# Altium PCB base.PcbDoc
Units mm, origin at the board's own origin, x right, y up, seen from the top; angles counter-clockwise.
Board outline 120.51 x 80.51 mm, 2 copper layers (Top Layer, Bottom Layer); 50 components, 42 nets, 143 pads, 4 vias.
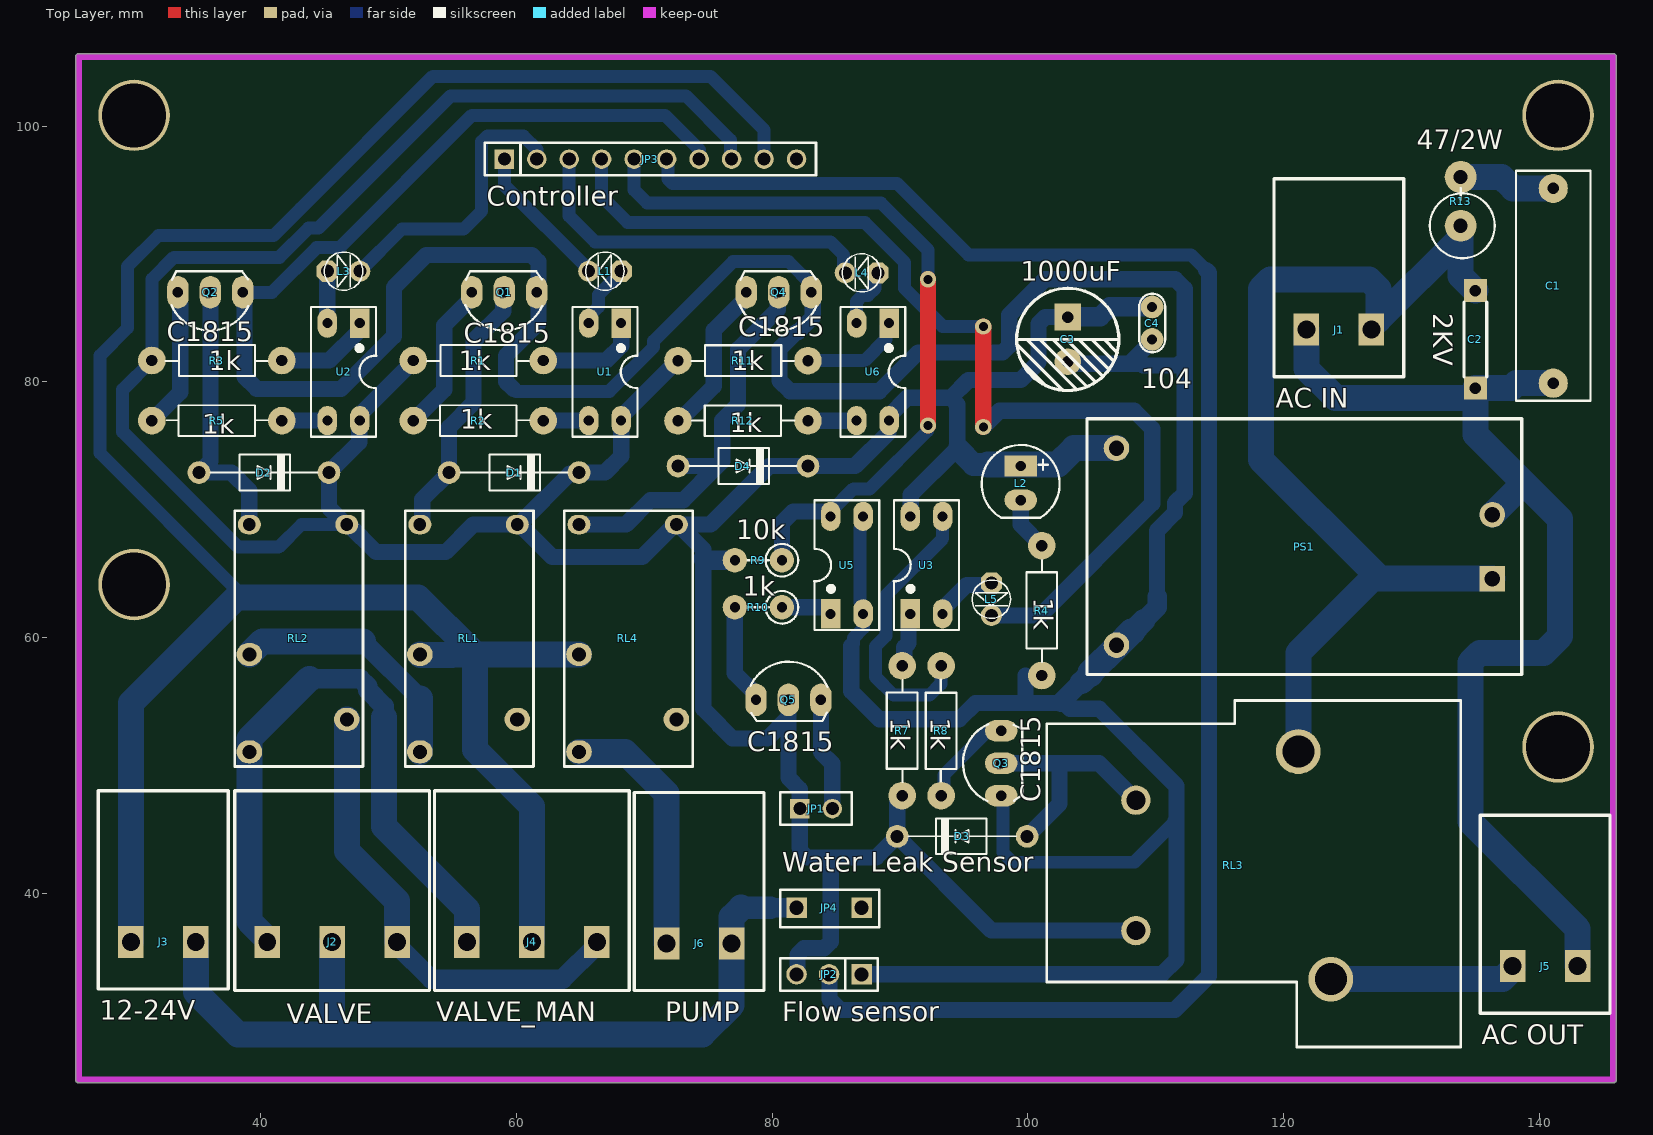
[diagram p0: Top Layer view]
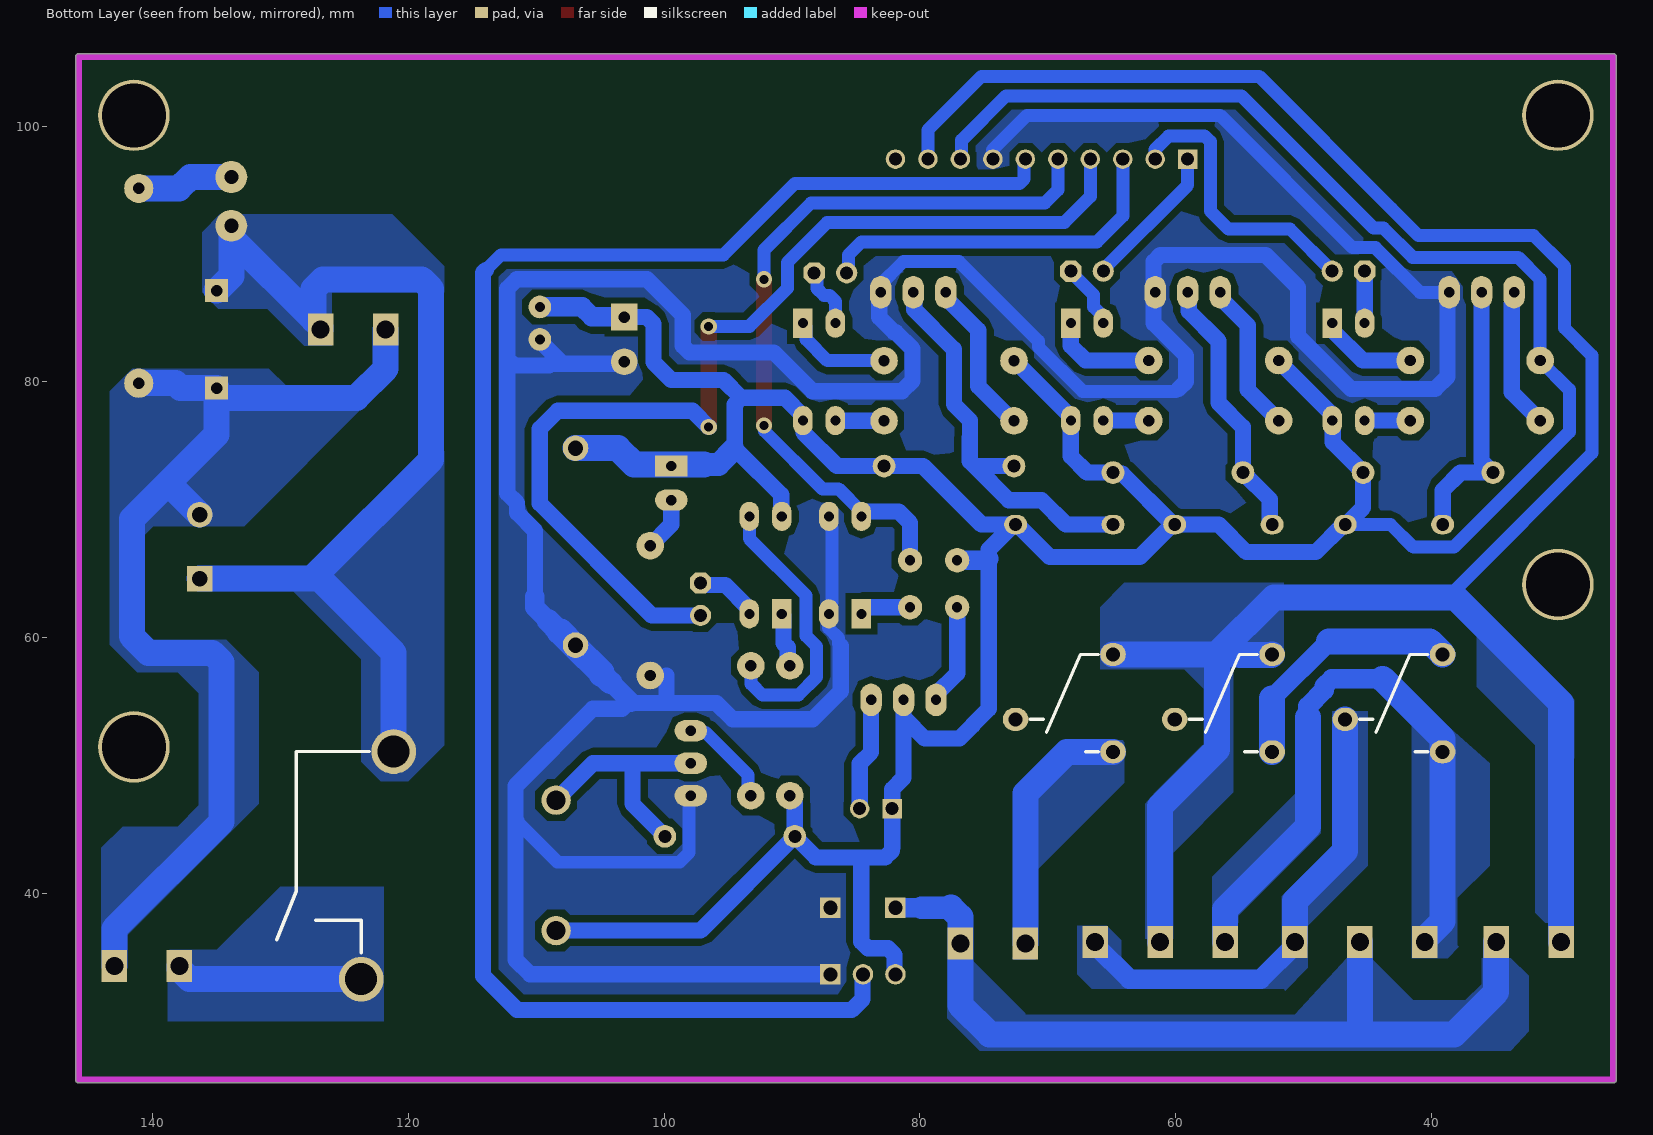
[diagram p1: Bottom Layer view, seen from below]

## Layer stack, top to bottom
Top Solder: solder mask 0.0102, Solder Resist, Dk 3.5
Top Layer: signal copper 0.0356
Dielectric 1: dielectric 0.32, FR-4, Dk 4.8
Bottom Layer: signal copper 0.0356
Bottom Solder: solder mask 0.0102, Solder Resist, Dk 3.5

## Board outline
25.527,25.41 ccw(c25.781,25.41) 25.781,25.156 145.781,25.156 ccw(c145.781,25.41) 146.035,25.41 146.035,105.41 ccw(c145.781,105.41) 145.781,105.664 25.781,105.664 ccw(c25.781,105.41) 25.527,105.41

## Design rules (kind name [scope] priority, off if disabled: settings)
Clearance Clearance_1 [OnMid vs InNet('AC_IN') And OnMid] p1: gap=1.27 ignorepadtopadclearanceinfootprint=FALSE sourcerule=48 cellrowname=All cellrowtype=0 cellcolname=AC_IN cellcoltype=1 innerlayers=TRUE
Clearance Clearance_2 [(ExistsOnLayer('Top Layer') Or ExistsOnLayer('Bottom Layer')) vs InNet('AC_IN') And (ExistsOnLayer('Top Layer') Or ExistsOnLayer('Bottom Layer'))] p2: gap=1.27 ignorepadtopadclearanceinfootprint=FALSE sourcerule=48 cellrowname=All cellrowtype=0 cellcolname=AC_IN cellcoltype=1 outerlayers=TRUE
Clearance Clearance_3 [ vs InNet('AC_IN')] p3: gap=0.254 ignorepadtopadclearanceinfootprint=FALSE sourcerule=48 cellrowname=All cellrowtype=0 cellcolname=AC_IN cellcoltype=1
Clearance Clearance_1 [OnMid vs InNet('AC_N') And OnMid] p4: gap=1.27 ignorepadtopadclearanceinfootprint=FALSE sourcerule=48 cellrowname=All cellrowtype=0 cellcolname=AC_N cellcoltype=1 innerlayers=TRUE
Clearance Clearance_2 [(ExistsOnLayer('Top Layer') Or ExistsOnLayer('Bottom Layer')) vs InNet('AC_N') And (ExistsOnLayer('Top Layer') Or ExistsOnLayer('Bottom Layer'))] p5: gap=1.27 ignorepadtopadclearanceinfootprint=FALSE sourcerule=48 cellrowname=All cellrowtype=0 cellcolname=AC_N cellcoltype=1 outerlayers=TRUE
Clearance Clearance_3 [ vs InNet('AC_N')] p6: gap=0.254 ignorepadtopadclearanceinfootprint=FALSE sourcerule=48 cellrowname=All cellrowtype=0 cellcolname=AC_N cellcoltype=1
Clearance Clearance_1 [OnMid vs InNet('AC_OUT') And OnMid] p7: gap=1.27 ignorepadtopadclearanceinfootprint=FALSE sourcerule=48 cellrowname=All cellrowtype=0 cellcolname=AC_OUT cellcoltype=1 innerlayers=TRUE
Clearance Clearance_2 [(ExistsOnLayer('Top Layer') Or ExistsOnLayer('Bottom Layer')) vs InNet('AC_OUT') And (ExistsOnLayer('Top Layer') Or ExistsOnLayer('Bottom Layer'))] p8: gap=1.27 ignorepadtopadclearanceinfootprint=FALSE sourcerule=48 cellrowname=All cellrowtype=0 cellcolname=AC_OUT cellcoltype=1 outerlayers=TRUE
Clearance Clearance_3 [ vs InNet('AC_OUT')] p9: gap=0.254 ignorepadtopadclearanceinfootprint=FALSE sourcerule=48 cellrowname=All cellrowtype=0 cellcolname=AC_OUT cellcoltype=1
Clearance Clearance_1 [OnMid vs OnMid] p10: gap=0.508 ignorepadtopadclearanceinfootprint=FALSE sourcerule=48 cellrowname=All cellrowtype=0 cellcolname=All cellcoltype=0 innerlayers=TRUE
Clearance Clearance_2 [(ExistsOnLayer('Top Layer') Or ExistsOnLayer('Bottom Layer')) vs (ExistsOnLayer('Top Layer') Or ExistsOnLayer('Bottom Layer'))] p11: gap=0.508 ignorepadtopadclearanceinfootprint=FALSE sourcerule=48 cellrowname=All cellrowtype=0 cellcolname=All cellcoltype=0 outerlayers=TRUE
Clearance [All] p12: gap=0.635 ignorepadtopadclearanceinfootprint=FALSE ismatrix=TRUE miname0=AC_OUT mitype0=1 miname1=AC_N mitype1=1 miname2=AC_IN mitype2=1
PolygonConnect [All] p1: connectstyle=Direct reliefconductorwidth=0.254 reliefentries=4 polygonreliefangle="90 Angle" airgapwidth=0.254
RoutingVias [All] p1: holewidth=0.711 width=1.27 viastyle="Through Hole" minholewidth=0.711 minwidth=1.27 maxholewidth=0.711 maxwidth=1.27
SolderMaskExpansion [All] p1: expansion=0.102 istentingtop=FALSE
SupplyNets "Schematic Supply Nets_1" [InNet('GND')] p1: voltage=0.000
SupplyNets "Schematic Supply Nets_2" [InNet('VCC')] p2: voltage=0.000
SupplyNets "Schematic Supply Nets" [InNet('+5')] p3: voltage=0.000
Width [All] p1: maxlimit=2.032 minlimit=1.016 preferedwidth=1.27 minimp=50.000000 maximp=50.000000 favimp=50.000000
30 further rules are at their usual default settings.

## Components (designator, comment, footprint, x,y, rotation, side; value= is the part's Value field where it differs from the comment)
C1 "CN" "Cap 15mm" 141.097,95.123 r270 top
C2 "2KV" "Cap 7.5mm" 135.001,79.502 r90 top
C3 "1000uF" "tu hoa 8mm" 103.124,83.312 r270 top
C4 "104" "Cap 2.54mm" 109.728,83.312 r90 top
D1 "Diode" DIO-1A 54.737,72.898 r0 top value=1N5007
D2 "Diode" DIO-1A 35.179,72.898 r0 top value=1N5007
D3 "Diode" DIO-1A 99.949,44.45 r180 top value=1N5007
D4 "Diode" DIO-1A 72.644,73.406 r0 top value=1N5007
J1 "AC IN" "CON 2 2EDG5.08" 121.793,84.074 r0 top
J2 "VALVE" "CON 3 2EDG5.08" 40.513,36.195 r0 top
J3 "12-24V" "CON 2 2EDG5.08" 29.845,36.195 r0 top
J4 "VALVE_MAN" "CON 3 2EDG5.08" 56.134,36.195 r0 top
J5 "AC OUT" "CON 2 2EDG5.08" 137.922,34.29 r0 top
J6 "PUMP" "CON 2 2EDG5.08" 71.755,36.068 r0 top
JP1 "Water Leak Sensor" "JP 1x2 CT" 82.169,46.609 r0 top
JP2 "Flow sensor" "JP 1x3 DT" 86.995,33.655 r180 top
JP3 "Controller" "JP 1x10 CT" 59.055,97.409 r0 top
JP4 "Jumper" "Jumper 5.08" 81.915,38.862 r0 top
L1 "LED 3mm" LED-3MM-RED 68.199,88.646 r180 top
L2 "LED 5mm" LED-5MM-Green 99.441,73.279 r270 top
L3 "LED 3mm" LED-3MM-RED 45.212,88.646 r0 top
L4 "LED 3mm" LED-3MM-RED 88.265,88.519 r180 top
L5 "LED 3mm" LED-3MM-RED 97.155,64.262 r270 top
PS1 "HLK-PM01 5V" CONV_HLK-PM01 136.334,67.103 r180 top
Q1 "C1815" TO92 59.055,86.995 r180 top value=C9014
Q2 "C1815" TO92 36.068,86.995 r180 top value=C9014
Q3 "C1815" TO92 97.917,50.165 r90 top value=C9014
Q4 "C1815" TO92 80.518,86.995 r180 top value=C9014
Q5 "C1815" TO92 81.28,55.118 r0 top value=C9014
R1 "1k" RES-1/4W 57.404,81.534 r0 top
R2 "1k" RES-1/4W 56.642,77.089 r180 top
R3 "1k" RES-1/4W 36.957,81.534 r0 top
R4 "1k" RES-1/4W 101.219,62.484 r90 top
R5 "1k" RES-1/4W 36.195,77.089 r180 top
R7 "1k" RES-1/4W 90.297,53.086 r90 top
R8 "1k" RES-1/4W 93.091,52.324 r270 top
R9 "10k" RES-1/4WD 79.121,66.04 r180 top
R10 "1k" RES-1/4WD 79.121,62.357 r180 top
R11 "1k" RES-1/4W 78.105,81.52 r0 top
R12 "1k" RES-1/4W 77.343,77.075 r180 top
R13 "47/2W" R2WD 133.858,97.282 r270 top value="R2W - 47"
RL1 "ALQ Relay" Relay-LQ-form-C 52.451,68.834 r270 top
RL2 "ALQ Relay" Relay-LQ-form-C 39.116,68.834 r270 top
RL3 "HF105F-1/005D-1HS" Relay-HF-30A-Form-A 108.458,47.274 r270 top
RL4 "ALQ Relay" Relay-LQ-form-C 64.897,68.834 r270 top
U1 "PC817" DIP4 68.199,84.582 r180 top
U2 "PC817" DIP4 47.752,84.582 r180 top
U3 "PC817" DIP4 90.805,61.849 r0 top
U5 "PC817" DIP4 84.582,61.849 r0 top
U6 "PC817" DIP4 89.154,84.582 r180 top

## Footprints (in the part's own frame and the unit in brackets; to place one, negate y for a bottom-side part, rotate by r counter-clockwise, add the part's x,y. Pads: shape width x height; smd on the part's side, far side on the other; paste and mask are expansions set on the pad)
"Cap 2.54mm" [mil]
  round 70 hole 31: 1(0,0) 2(100,0)
  silkscreen extent -40,-40 141,40, body extent -60,-30 170,37, height 265
"Cap 7.5mm" [mm] "103 2KV"
  rect 1.8x1.8 hole 0.9: 1(0,0) 2(7.62,0)
  silkscreen extent 0.89,-0.89 6.73,0.89, body extent -0.19,-1.2 7.81,1.19, height 9.03
"Cap 15mm" [mil]
  round 90 hole 35: 1(0,0) 2(600,0)
  silkscreen extent -54,-115 654,115, body extent -54,-145 654,150, height 731
"CON 2 2EDG5.08" [mm]
  rect 2x2.5 hole 1.4: 1(0,0) 2(5.08,0)
  silkscreen extent -2.54,-3.68 7.62,11.81, body extent -2.54,-3.74 7.62,11.87, height 21.08
"CON 3 2EDG5.08" [mm]
  rect 2x2.5 hole 1.4: 1(0,0) 2(5.08,0) 3(10.16,0)
  silkscreen extent -2.54,-3.81 12.7,11.81, body extent -2.54,-3.81 12.7,11.8, height 21.08
CONV_HLK-PM01 [mm]
  rect 2x2 hole 1.2: 1(0,2.5)
  round 2 hole 1.2: 2(0,-2.5) 3(29.4,7.7) 4(29.4,-7.7)
  silkscreen extent -2.3,-10 31.7,10, body extent -2.29,-10.1 31.71,10.1, height 15.3
DIO-1A [mil]
  round 70 hole 40: 1(0,0) 2(400,0)
  silkscreen extent 35,-55 365,55, body extent -11,-50 411,54, height 102
DIP4 [mil]
  rect 60x90 hole 31: 1(0,0)
  oval 60x90 hole 31: 2(100,0) 3(100,300) 4(0,300)
  silkscreen extent -50,-50 150,350, body extent -59,-10 159,305, height 170
"JP 1x2 CT" [mm] "JP 1x2 CT"
  rect 1.52x1.52 hole 1.02: 1(0,0)
  round 1.52 hole 1.02: 2(2.54,0)
  silkscreen extent -1.52,-1.27 4.06,1.27, body extent -1.52,-1.25 4.06,1.25, height 8.51
"JP 1x3 DT" [mm]
  rect 1.6x1.6 hole 1.1: 1(0,0)
  round 1.6 hole 1.1: 2(2.54,0) 3(5.08,0)
  silkscreen extent -1.27,-1.27 6.35,1.27, body extent -1.27,-1.27 6.35,1.27, height 8.54
"JP 1x10 CT" [mm] "10 row, straight, gold plating"
  rect 1.52x1.52 hole 1.02: 1(0,0)
  round 1.52 hole 1.02: 2(2.54,0) 3(5.08,0) 4(7.62,0) 5(10.16,0) 6(12.7,0) 7(15.24,0) 8(17.78,0) 9(20.32,0) 10(22.86,0)
  silkscreen extent -1.52,-1.27 24.38,1.27, body extent -1.52,-1.25 24.38,1.25, height 8.51
"Jumper 5.08" [mm]
  rect 1.6x1.6 hole 1.1: 1(0,0) 2(5.08,0)
  silkscreen extent -1.27,-1.52 6.48,1.4, body extent -1.27,-1.27 6.35,1.27, height 8.54
LED-3MM-RED [mil]
  oct 65x65 hole 40: 1(0,0)
  round 65 hole 40: 2(100,0)
  silkscreen extent -9,-59 109,59, body extent -27,-77 117,80, height 181
LED-5MM-Green [mil] "LED 2 PIN, 5 ly , Only colour,pin to pin 100mil"
  rect 65x100 hole 32: 1(-5,0)
  oval 65x100 hole 32: 2(100,0)
  silkscreen extent -70,-120 154,120, body extent -69,-120 145,117, height 339
R2WD [mm] "R2W, 2 pin, 150mil"
  round 2.5 hole 1.1: 1(1.27,0) 2(5.08,0)
  silkscreen extent 2.16,-2.41 7.62,2.67, body extent -1.25,-2.41 7.6,2.59, height 13.97
Relay-HF-30A-Form-A [mm]
  round 3.5 hole 2.5: 1(-3.8,12.7) 3(14,15.24)
  round 2.3 hole 1.5: 4(0,0) 5(10.2,0)
  silkscreen extent -7.8,-6.99 19.3,25.4, body extent -7.84,-6.99 19.26,25.31, height 20.1
Relay-LQ-form-C [mm]
  oval 1.8x2 hole 1.1: 1(10.16,0) 2(15.24,7.62) 3(17.78,0)
  oval 1.524x1.8 hole 1: 4(0,0) 5(0,7.62)
  silkscreen extent -1.08,-1.14 18.92,8.89, body extent -1.11,-1.19 18.89,8.81, height 16
RES-1/4W [mil]
  round 85 hole 35: 1(-215,5) 2(185,5)
  silkscreen extent -173,-42 141,52, body extent -227,-42 197,52, height 95
RES-1/4WD [mm]
  round 1.905 hole 0.8: 1(-1.651,0) 2(2.032,0)
  silkscreen extent -2.93,-1.28 1.02,1.28, body extent -2.85,-1.14 2.35,1.16, height 9.64
TO92 [mil] "TO-92"
  oval 66x100 hole 32: 1(-100,0) 2(0,0) 3(100,0)
  silkscreen extent -117,-65 120,118, body extent -109,-66 109,95, height 245
"tu hoa 8mm" [mm]
  rect 2.1x2.1 hole 0.9: 1(-1.75,0)
  round 2.1 hole 0.9: 2(1.75,0)
  silkscreen extent -4,-4 4,4, body extent -4.1,-4.07 4.1,4.13, height 13.81

## Part data
C1: "Capacitor"
C2: library part "Cap 103 2KV", "Capacitor Ceramic 2KV"
C3: library part "Tu Hoa 1000uF 16V 8x20", "Cắm", Chung_Loai=Cắm, Don_Vi=Con, Ma_Hang=MH008300, So_Chan=2, Ten_Linh_Kien="Tụ Hóa 1000uF 16V 8x20MM"
C4: library part CN, "Capacitor"
D1 D2 D3 D4: "Default Diode", Code - JEDEC=DO-214-AB, Published=8-Jun-2000, Publisher="Altium Limited", Revision="July-2002: Re-released for DXP Platform."
J1 J3 J5 J6: library part "CON 2 EDG5.08", "CON2 KF terminal"
J2 J4: library part "CON 3 EDG5.08", "CON3 KF terminal"
JP1: library part "JP 1x2 2.54 Cai Thang", "Cắm", Chung_Loai=Cắm, Don_Vi=Con, Ma_Hang=MH004006, Ten_Linh_Kien="Jump Đơn Cái 2.54MM 1x20P Thẳng"
JP2: library part "JP 1x3 2.54 Duc Thang", "Cắm", Chung_Loai=Cắm, Don_Vi=Con, Ma_Hang=MH000903, Ten_Linh_Kien="Jump Đơn Đực 2.54MM 1x40P Thẳng 11MM"
JP3: library part "JP 1x10 2.54 Cai Thang", "Cắm", Chung_Loai=Cắm, Don_Vi=Con, Ma_Hang=MH004006, Ten_Linh_Kien="Jump Đơn Cái 2.54MM 1x20P Thẳng"
JP4: "jump 2.54 jump 5.08"
L1 L3 L4 L5: library part "LED 3mm Do", "Cắm", Chung_Loai=Cắm, Don_Vi=Con, Ma_Hang=MH003892, Ten_Linh_Kien="Led 3MM Phủ Đỏ (10c)"
L2: library part "LED 5mm Xanh La", "Cắm", Chung_Loai=Cắm, Don_Vi=Con, Ma_Hang=MH008969, Ten_Linh_Kien="LED 5MM Phủ Xanh (1000c)"
PS1: library part "CONV HLK-PM01", "220VAC to 5V 3W", Package="Non-Standard Hi-link", Availability="Not in stock", Check_prices=https://www.snapeda.com/parts/HLK-20M12/Hi-link/view-part/?ref=eda, MF=Hi-link, MP=HLK-20M12, Price=None, SnapEDA_Link=https://www.snapeda.com/parts/HLK-20M12/Hi-link/view-part/?ref=snap
Q1 Q2 Q3 Q4 Q5: library part "Trans C1815 DIP", "NPN transistor"
R1 R2 R3 R4 R5 R7 R8 R9 R10 R11 R12: library part Res, "Res", Manufacturer="Generic Components", Class=Passive, Published=08/06/2000, Publisher="Altium Hobart Technology Centre", SubClass=R
R13: library part R2W, "Resistor 2W"
RL1 RL2 RL4: library part "Relay Panasonic LQ", "ALQ Relay 10A", ComponentLink1Description=Datasheet, ComponentLink1URL=https://api.pim.na.industrial.panasonic.com/file_stream/main/fileversion/306
RL3: library part "Relay 30A 4P", "Relay hongfa 30A 4P HF105F-1/005D-1HS"
U1 U2 U3 U5 U6: "Single Opto"

## Free pads (board coordinates)
  round 5.588 hole 5: ""(30.099,64.135) ""(30.099,100.838) ""(141.478,51.435) ""(141.478,100.838)

## Via types
v1: diameter 1.27, hole 0.711, Top Layer to Bottom Layer, 4 vias

## Nets (pads, with @x,y where several pads share a name; then routed paths per layer and width w, separated by ;. In a path a pad name is that pad's centre, name@x,y a point inside that pad or via, vN(x,y) a via of type N, cw(c..) or ccw(c..) an arc to the next point about the centre after c; other vN are vias at no path point)
+5: C3.1 C4.2 D1.2 D2.2 D3.2 D4.2 JP1.1 JP2.3 JP3.8 L2.1 PS1.4 Q5.2 R1.1 R3.1 R7.1 R9.2 R11.1 RL1.5 RL2.5 RL3.5 RL4.5 U1.4 U2.4 U3.4 U6.4 | length 307
  Bottom Layer w1.016: RL2.5 46.667,68.834 43.191,68.834 41.413,67.056 38.242,67.056 29.21,76.088 29.21,79.375 R3.1 31.496,88.017 33.207,89.729 41.464,89.729 43.747,92.011 44.514,92.011 54.864,102.362 73.273,102.362 76.739,98.897 76.739,97.505 JP3.8
  Bottom Layer w1.27: RL2.5@46.667,68.834 45.339,70.162 D2.2 47.703,75.262 U2.4@47.703,76.962 ; RL2.5 46.874,68.834 49.033,66.675 54.463,66.675 56.622,68.834 RL1.5 ; U2.4@47.752,77.406 51.943,81.597 R1.1 ; RL1.5@60.209,68.834 64.176,72.801 64.8,72.801 D1.2 66.929,72.898 68.199,74.168 U1.4 68.199,77.274 72.572,81.647 R11.1 ; RL1.5@60.266,68.834 62.806,66.294 69.839,66.294 72.379,68.834 RL4.5 RL4.5@72.655,68.834 ; 81.202,53.661 79.629,52.088 76.911,52.088 75.87,53.129 75.87,53.162 74.612,54.419 74.612,66.167 74.612,66.877 RL4.5@72.655,68.834 ; Q5.2 81.28,53.661 81.28,49.022 82.169,48.133 JP1.1 82.169,43.561 82.182,43.548 82.182,43.32 82.703,42.799 84.582,42.799 ; JP2.3 81.978,33.718 81.978,35.166 82.499,35.687 84.061,35.687 84.582,36.208 84.582,42.799 ; R7.1 90.17,47.384 89.789,47.003 D3.2 ; U3.4 90.854,69.518 90.854,71.169 94.234,74.549 ; 94.488,74.803 94.488,78.219 93.967,78.74 ; C3.1 101.359,85.062 100.838,84.541 100.838,81.534 99.441,80.137 95.364,80.137 93.967,78.74 ; RL3.5 97.165,37.074 D3.2 ; RL4.5@72.655,68.834 75.184,68.834 79.756,73.406 D4.2 86.487,73.406 89.105,76.024 89.105,76.913 U6.4 89.154,77.343 90.551,78.74 93.967,78.74 ; 84.582,42.799 88.138,42.799 D3.2
  Bottom Layer w1.524: 74.612,66.167 74.739,66.04 R9.2@76.835,66.04 ; C3.1@103.152,85.09 105.664,85.09 106.426,85.852 C4.2@109.659,85.852
  Bottom Layer w1.778: 94.615,74.676 95.758,73.533 96.901,73.533
  Bottom Layer w2.032: 96.901,73.533 99.822,73.533 102.362,73.533 103.632,74.803 PS1.4
AC_IN: C2.2 J1.2 PS1.1 R13.2 RL3.1 | length 80.5
  Bottom Layer w2.032: RL3.1 121.158,58.787 127.261,64.89 ; J1.2 126.873,84.292 J1.2@127.412,84.831 ; C2.2 133.858,88.265 R13.2 133.768,92.112 133.768,91.187 J1.2@127.412,84.831 ; PS1.1 127.548,64.603 127.261,64.89 ; 127.261,64.89 118.237,73.914 118.237,87.267 118.981,88.011 126.668,88.011 127.412,87.267 J1.2@127.412,84.831
AC_N: C1.2 C2.1 J1.1 J5.2 PS1.2 | length 84.3
  Bottom Layer w2.032: J1.1 121.793,81.026 124.079,78.74 C2.1@135.001,78.74 ; PS1.2 138.585,71.854 139.036,71.854 ; C1.2 138.205,79.883 137.824,79.502 C2.1 C2.1@135.001,78.74 ; J5.2 143.002,37.211 134.62,45.593 134.62,58.057 135.364,58.801 140.335,58.801 141.64,60.106 141.64,69.25 139.036,71.854 ; C2.1@135.001,78.74 135.001,75.889 139.036,71.854
AC_OUT: J5.1 RL3.3 | length 14.8
  Bottom Layer w2.032: RL3.3 137.124,33.274 137.922,34.072 J5.1
FLOW: JP2.2 JP3.6 | length 135
  Bottom Layer w1.016: JP3.6 71.851,97.313 71.851,95.854 72.201,95.504 89.789,95.504 95.377,89.916 112.776,89.916 113.943,88.749
  Bottom Layer w1.27: JP2.2 84.493,33.617 84.493,31.712 85.344,30.861 111.506,30.861 114.173,33.528 114.173,88.519 113.943,88.749
GND: C3.2 C4.1 JP2.1 JP3.7 JP4.2 PS1.3 Q1.1 Q2.1 Q3.1 Q4.1 R4.1 U5.2 U5.3 | length 318.4
  Bottom Layer w1.016: Q2.1@38.735,86.995 40.886,86.995 44.378,90.487 46.164,90.487 56.515,100.838 71.628,100.838 74.326,98.14 JP3.7@74.326,97.505 ; 59.766,79.438 59.957,79.248 67.272,79.248 70.739,82.715 70.739,83.185 76.962,89.408 81.286,89.408 83.185,87.509 Q4.1@83.185,86.995 ; 86.199,59.327 86.36,59.488 86.36,59.944 87.152,60.736 87.152,61.752 87.249,61.849 87.249,62.367 86.868,62.748 86.868,68.57 87.249,68.951 U5.3@87.249,69.469 ; Q3.1@98.044,47.625 98.044,43.18 98.806,42.418 108.331,42.418 111.506,45.593
  Bottom Layer w1.27: Q2.1@38.735,86.995 38.735,80.391 39.688,79.438 46.291,79.438 50.419,83.566 50.419,87.376 52.959,89.916 61.201,89.916 61.722,89.395 61.722,86.995 61.722,84.582 59.182,82.042 59.182,80.023 59.766,79.438 ; Q4.1@83.136,86.946 83.136,86.198 83.185,86.149 83.185,85.044 82.01,83.87 81.883,83.87 80.581,82.568 80.581,80.073 81.407,79.248 88.392,79.248 91.44,82.296 98.031,82.296 98.552,82.817 98.552,85.217 101.346,88.011 111.532,88.011 112.268,87.275 112.268,81.801 ; 86.199,59.327 86.199,55.787 88.392,53.594 94.638,53.594 95.908,54.864 99.822,54.864 ; JP2.1@87.122,33.655 110.49,33.655 111.633,34.798 111.633,45.466 111.506,45.593 111.633,45.72 111.633,48.387 105.588,54.432 103.298,54.432 102.79,54.94 102.616,54.94 ; 99.822,57.023 99.822,54.864 ; 102.311,54.864 99.822,54.864 ; C3.2@103.251,81.562 103.406,81.407 107.95,81.407 ; C4.1@109.855,83.312 107.95,81.407 ; 110.109,63.199 110.109,68.352 111.506,69.749 111.506,70.519 112.268,71.281 112.268,81.28 112.268,81.801 ; 107.95,81.407 108.886,81.407 109.013,81.28 111.747,81.28 112.268,81.801
  Bottom Layer w1.524: 102.616,54.94 104.14,56.464 ; 109.093,61.341 110.109,62.357 110.109,63.199
  Bottom Layer w1.778: 104.14,56.464 104.216,56.464 104.902,57.15 ; 108.204,60.452 109.093,61.341
  Bottom Layer w2.032: 104.902,57.15 104.902,57.244 107.061,59.403 108.11,60.452 108.204,60.452
NetC1_1: C1.1 R13.1 | length 7.6
  Bottom Layer w2.032: R13.1 137.062,96.012 137.951,95.123 C1.1
NetD1_1: D1.1 Q1.2 RL1.4 | length 20.9
  Bottom Layer w1.27: RL1.4 52.52,68.834 52.638,68.951 52.638,70.799 D1.1 54.737,76.454 56.642,78.359 56.642,83.185 58.977,85.52 58.977,86.917 Q1.2
NetD2_1: D2.1 Q2.2 RL2.4 | length 20.8
  Bottom Layer w1.27: Q2.2@36.068,86.106 36.068,73.787 D2.1 37.719,72.898 39.116,71.501 RL2.4 ; RL2.4@39.179,68.897 RL2.4@39.194,68.883
NetD3_1: D3.1 Q3.2 RL3.4 | length 18.5
  Bottom Layer w1.27: Q3.2 102.489,50.165 ; D3.1 102.489,46.99 102.489,50.165 ; RL3.4 105.567,50.165 102.489,50.165
NetD4_1: D4.1 Q4.2 RL4.4 | length 31.4
  Bottom Layer w1.27: RL4.4 68.575,68.834 70.48,70.739 73.055,70.739 75.722,73.406 ; D4.1 75.722,73.406 ; Q4.2 80.44,86.917 80.44,85.647 77.343,82.55 77.343,78.232 76.073,76.962 76.073,75.692 76.103,75.662 76.103,73.787 75.722,73.406
NetL1_1: L1.1 U1.2 | length 5.1
  Bottom Layer w1.016: U1.2 65.659,85.1 66.421,85.862 66.421,86.804 68.199,88.582 L1.1
NetL2_2: L2.2 R4.2 | length 4.2
  Bottom Layer w1.27: L2.2 99.441,68.834 R4.2
NetL3_1: L3.1 U2.2 | length 4.1
  Bottom Layer w1.27: U2.2 L3.1
NetL4_1: L4.1 U6.2 | length 5
  Bottom Layer w1.016: U6.2 86.614,86.295 87.06,86.741 87.503,86.741 88.063,87.301 88.063,88.444 L4.1@88.265,88.646
NetL5_1: L5.1 U3.2 | length 5
  Bottom Layer w1.27: U3.2 93.345,62.23 95.227,64.112 97.005,64.112 L5.1
NetQ1_3: Q1.3 R2.2 | length 11.9
  Bottom Layer w1.27: R2.2 54.356,79.375 54.356,84.404 56.515,86.563 Q1.3
NetQ2_3: Q2.3 R5.2 | length 11
  Bottom Layer w1.27: R5.2 33.718,79.184 33.718,86.085 33.606,86.198 33.606,86.917 Q2.3
NetQ3_3: Q3.3 R8.2 | length 7.6
  Bottom Layer w1.016: R8.2 93.437,47.844 93.437,49.241 96.775,52.579 97.791,52.579 Q3.3
NetQ4_3: Q4.3 R12.2 | length 12.3
  Bottom Layer w1.27: R12.2 72.739,76.948 75.441,79.65 75.441,84.026 77.978,86.563 Q4.3
NetQ5_1: Q5.1 R10.2 | length 7.9
  Bottom Layer w1.27: R10.2 77.089,57.201 78.74,55.55 Q5.1
NetR1_2: R1.2 U1.1 | length 8.3
  Bottom Layer w1.27: R1.2 67.043,81.661 68.199,82.817 U1.1
NetR2_1: R2.1 U1.3 | length 3.6
  Bottom Layer w1.27: R2.1 U1.3
NetR3_2: R3.2 U2.1 | length 7.6
  Bottom Layer w1.27: R3.2 45.366,81.661 47.625,83.92 47.625,84.455 U2.1
NetR5_1: R5.1 U2.3 | length 3.6
  Bottom Layer w1.27: R5.1 U2.3
NetR7_2: R7.2 U3.1 | length 4.3
  Bottom Layer w1.27: R7.2 90.34,57.955 90.34,59.225 90.678,59.563 90.678,61.722 U3.1
NetR8_1: R8.1 U3.3 | length 22.2
  Bottom Layer w1.016: R8.1 93.197,57.764 93.197,56.367 92.329,55.499 89.493,55.499 88.075,56.917 88.075,59.294 88.9,60.12 88.9,63.286 93.345,67.731 U3.3
NetR10_1: R10.1 U5.1 | length 4
  Bottom Layer w1.27: R10.1 84.455,62.357 84.582,62.23 U5.1@84.582,62.103
NetR11_2: R11.2 U6.1 | length 8.2
  Bottom Layer w1.016: R11.2 87.235,81.647 88.9,83.312 88.9,84.328 U6.1
NetR12_1: R12.1 U6.3 | length 3.8
  Bottom Layer w1.27: R12.1 82.811,76.955 U6.3@86.614,76.955
P_GND: J2.2 J3.2 J6.2 JP4.1 | length 67.7
  Bottom Layer w1.524: 79.883,38.862 JP4.1
  Bottom Layer w1.778: 77.579,38.862 79.883,38.862
  Bottom Layer w2.032: J3.2 34.925,32.258 38.227,28.956 45.593,28.956 ; J2.2 45.593,28.956 ; 77.579,38.862 76.835,38.118 J6.2 76.835,31.242 74.549,28.956 45.593,28.956
PUMP+: J6.1 RL4.3 | length 19.9
  Bottom Layer w2.032: RL4.3 68.489,51.054 71.755,47.788 J6.1
R1: JP3.1 L1.2 | length 11.4
  Bottom Layer w1.016: JP3.1 59.055,95.377 L1.2@65.659,88.773
R2: JP3.2 L3.2 | length 22
  Bottom Layer w1.016: L3.2 51.054,91.948 55.88,91.948 57.279,93.347 57.279,98.778 57.725,99.225 60.551,99.225 61.595,98.18 JP3.2@61.595,98.044
R3: JP3.3 L4.2 | length 28.5
  Bottom Layer w1.016: JP3.3 64.135,92.964 66.167,90.932 84.586,90.932 85.603,89.914 85.603,88.768 L4.2@85.725,88.646
R4: JP3.4 L5.2 | length 82.4
  Top Layer w1.27: v1(96.52,76.454) v1(96.52,84.328)
  Bottom Layer w1.016: JP3.4 66.675,94.488 68.707,92.456 87.249,92.456 90.361,89.344 90.361,87.312 93.345,84.328 v1(96.52,84.328)
  Bottom Layer w1.27: v1(96.52,76.454) 97.79,77.724 108.331,77.724 109.728,76.327 109.728,70.485 100.965,61.722 L5.2
V_CLOSE: J2.1 J4.1 RL2.3 | length 51.1
  Bottom Layer w1.524: 43.815,56.769 47.792,56.769 48.387,56.174 48.387,55.88 49.657,54.61 49.657,53.721
  Bottom Layer w2.032: J2.1 40.513,36.413 39.116,37.81 39.116,52.07 43.815,56.769 ; 49.657,53.721 49.657,45.212 56.134,38.735 J4.1
V_OPEN: J2.3 J4.3 RL2.2 | length 37.4
  Bottom Layer w1.524: J2.3 50.673,35.945 53.344,33.274 63.623,33.274 66.294,35.945 J4.3
  Bottom Layer w2.032: RL2.2 46.736,43.307 50.673,39.37 J2.3
VCC: J3.1 J4.2 JP3.9 RL1.1 RL4.1 | length 178.8
  Bottom Layer w1.016: 38.1,63.119 38.1,63.754 27.432,74.422 27.432,82.042 29.591,84.201 29.591,89.027 32.004,91.44 41.02,91.44 43.116,93.535 53.467,103.886 75.184,103.886 79.375,99.695 JP3.9
  Bottom Layer w2.032: J3.1 29.845,54.864 38.1,63.119 52.324,63.119 56.769,58.674 ; RL1.1 52.504,58.621 54.975,58.621 55.028,58.674 56.769,58.674 ; J4.2 61.214,46.784 56.769,51.229 56.769,58.674 ; RL4.1 56.769,58.674
VCC_V+: RL1.3 RL2.1 | length 19.8
  Bottom Layer w1.524: 48.006,59.69 52.451,55.245
  Bottom Layer w2.032: RL2.1 40.132,59.69 48.006,59.69 ; RL1.3 52.451,55.245
WL_Sensor: JP1.2 Q5.3 | length 8.9
  Bottom Layer w1.27: Q5.3 83.82,51.032 84.709,50.143 JP1.2 JP1.2@84.705,46.613
WL_Signal: JP3.5 R9.1 U5.4 | length 59.1
  Top Layer w1.27: v1(92.202,76.581) v1(92.202,88.011)
  Bottom Layer w1.016: JP3.5 69.215,94.996 70.231,93.98 88.519,93.98 92.202,90.297 v1(92.202,88.011) ; U5.4 84.582,69.85 86.36,71.628 87.63,71.628 92.153,76.151 92.153,76.532 v1(92.202,76.581)
  Bottom Layer w1.27: R9.1 80.772,68.961 81.661,69.85 U5.4@84.465,69.85
pads on no net: JP3.10 RL1.2 RL4.2

## Polygon pours and split planes (outlines as drawn)
GND on Bottom Layer "GND_L02_P000" (solid, remove dead copper, pour order 0): 35.052,64.897 26.289,73.66 26.289,92.837 26.162,92.964 29.21,96.012 32.258,96.012 34.798,98.552 34.798,104.521 114.808,104.521 115.062,104.267 115.062,26.162 81.788,26.162 81.788,49.784 73.025,58.547 73.025,64.897 73.025,58.547 73.025,64.897
AC_IN on Bottom Layer "AC_IN_L02_P014" (solid, remove dead copper, pour order 14): 135.382,63.627 129.032,63.627 123.698,58.293 123.698,50.292 122.174,48.768 120.015,48.768 117.221,51.562 117.221,74.549 117.983,75.311 118.237,75.057 119.126,75.057 119.126,74.168 128.016,65.532 135.255,65.532
AC_OUT on Bottom Layer "AC_OUT_L02_P013" (solid, remove dead copper, pour order 13): 138.811,35.433 138.684,35.56 135.001,35.56 130.048,40.513 121.92,40.513 121.92,29.972 138.811,29.972
AC_N on Bottom Layer "AC_N_L02_P012" (solid, remove dead copper, pour order 12): 130.937,81.026 129.54,79.629 123.952,79.629 122.936,78.613 132.842,68.707 139.954,68.707 140.716,67.945 140.716,60.452 140.081,59.817 134.239,59.817 131.699,57.277 131.699,46.99 133.223,45.466 141.986,36.703 141.986,35.56 144.018,35.56 144.018,43.561 142.367,45.212 138.049,45.212 136.398,46.863 136.398,55.626 138.049,57.277 141.224,57.277 143.383,59.436 143.383,79.248 141.605,81.026
AC_IN on Bottom Layer "AC_IN_L02_P011" (solid, remove dead copper, pour order 11): 117.221,89.027 121.285,93.091 130.556,93.091 130.556,91.313 126.238,86.995 117.221,86.995
AC_IN on Bottom Layer "AC_IN_L02_P010" (solid, remove dead copper, pour order 10): 125.984,89.027 130.048,93.091 134.747,93.091 136.144,91.694 136.144,86.995 134.874,85.725 131.064,85.725 128.143,82.804 125.984,82.804
P_GND on Bottom Layer "P_GND_L02_P009" (solid, remove dead copper, pour order 9): 75.946,34.798 71.755,30.607 71.755,30.48 50.673,30.48 46.609,34.925 44.704,34.925 41.402,31.623 37.338,31.623 36.068,32.893 36.068,34.925 35.687,34.925 33.782,34.925 32.385,33.528 32.385,29.21 33.782,27.686 75.311,27.686 77.851,30.226 77.851,34.798
VCC on Bottom Layer "VCC_L02_P008" (solid, remove dead copper, pour order 8): 31.877,51.816 31.877,38.481 30.861,37.465 28.956,37.465 28.956,51.689
VCC on Bottom Layer "VCC_L02_P007" (solid, remove dead copper, pour order 7): 36.449,60.071 36.449,56.134 30.861,50.546 28.829,50.546 28.829,55.118 35.052,61.341
V_CLOSE on Bottom Layer "V_CLOSE_L02_P005" (solid, remove dead copper, pour order 5): 50.546,48.006 50.546,47.879 57.15,41.275 57.15,34.925 55.118,34.925 55.118,38.227 48.641,44.704 48.641,47.879
V_CLOSE on Bottom Layer "V_CLOSE_L02_P004" (solid, remove dead copper, pour order 4): 41.529,34.925 38.735,34.925 37.846,35.814 37.973,35.941 37.973,39.624 35.433,42.164 35.433,50.165 39.878,54.102 41.529,53.086
V_OPEN on Bottom Layer "V_OPEN_L02_P003" (solid, remove dead copper, pour order 3): 44.958,54.229 44.958,42.164 49.784,37.338 49.657,37.211 49.657,34.163 51.435,32.385 51.562,32.512 66.548,32.512 67.691,33.655 67.691,37.465 65.405,37.465 64.262,36.322 64.262,34.798 63.373,33.909 53.721,33.909 51.689,35.941 51.689,39.751 47.752,43.688 47.752,54.229
PUMP+ on Bottom Layer "PUMP+_L02_P002" (solid, remove dead copper, pour order 2): 64.008,51.816 64.008,48.641 70.993,41.656 70.993,34.798 72.644,34.798 72.771,34.925 72.644,35.052 72.644,48.26 68.961,51.943 64.135,51.943
VCC on Bottom Layer "VCC_L02_P001" (solid, remove dead copper, pour order 1): 51.562,58.928 51.562,64.262 64.008,64.262 65.913,62.357 65.913,57.531 59.309,57.531 57.785,56.007 57.785,51.562 57.912,51.562 61.595,47.879 62.357,46.99 62.357,36.449 60.198,36.449 60.198,43.18 55.499,47.879 55.499,57.785 52.324,57.785 51.816,58.293

## Keep-outs
Keep-Out Layer:
  lines w0.508: 25.781,25.41 25.781,105.41 145.781,105.41 145.781,25.41 25.781,25.41